# Altium PCB diban v0.0.PcbDoc
Units mm, origin at the board's own origin, x right, y up, seen from the top; angles counter-clockwise.
Board outline 82 x 65 mm, 2 copper layers (Top Layer, Bottom Layer); 21 components, 10 nets, 94 pads, 162 vias.
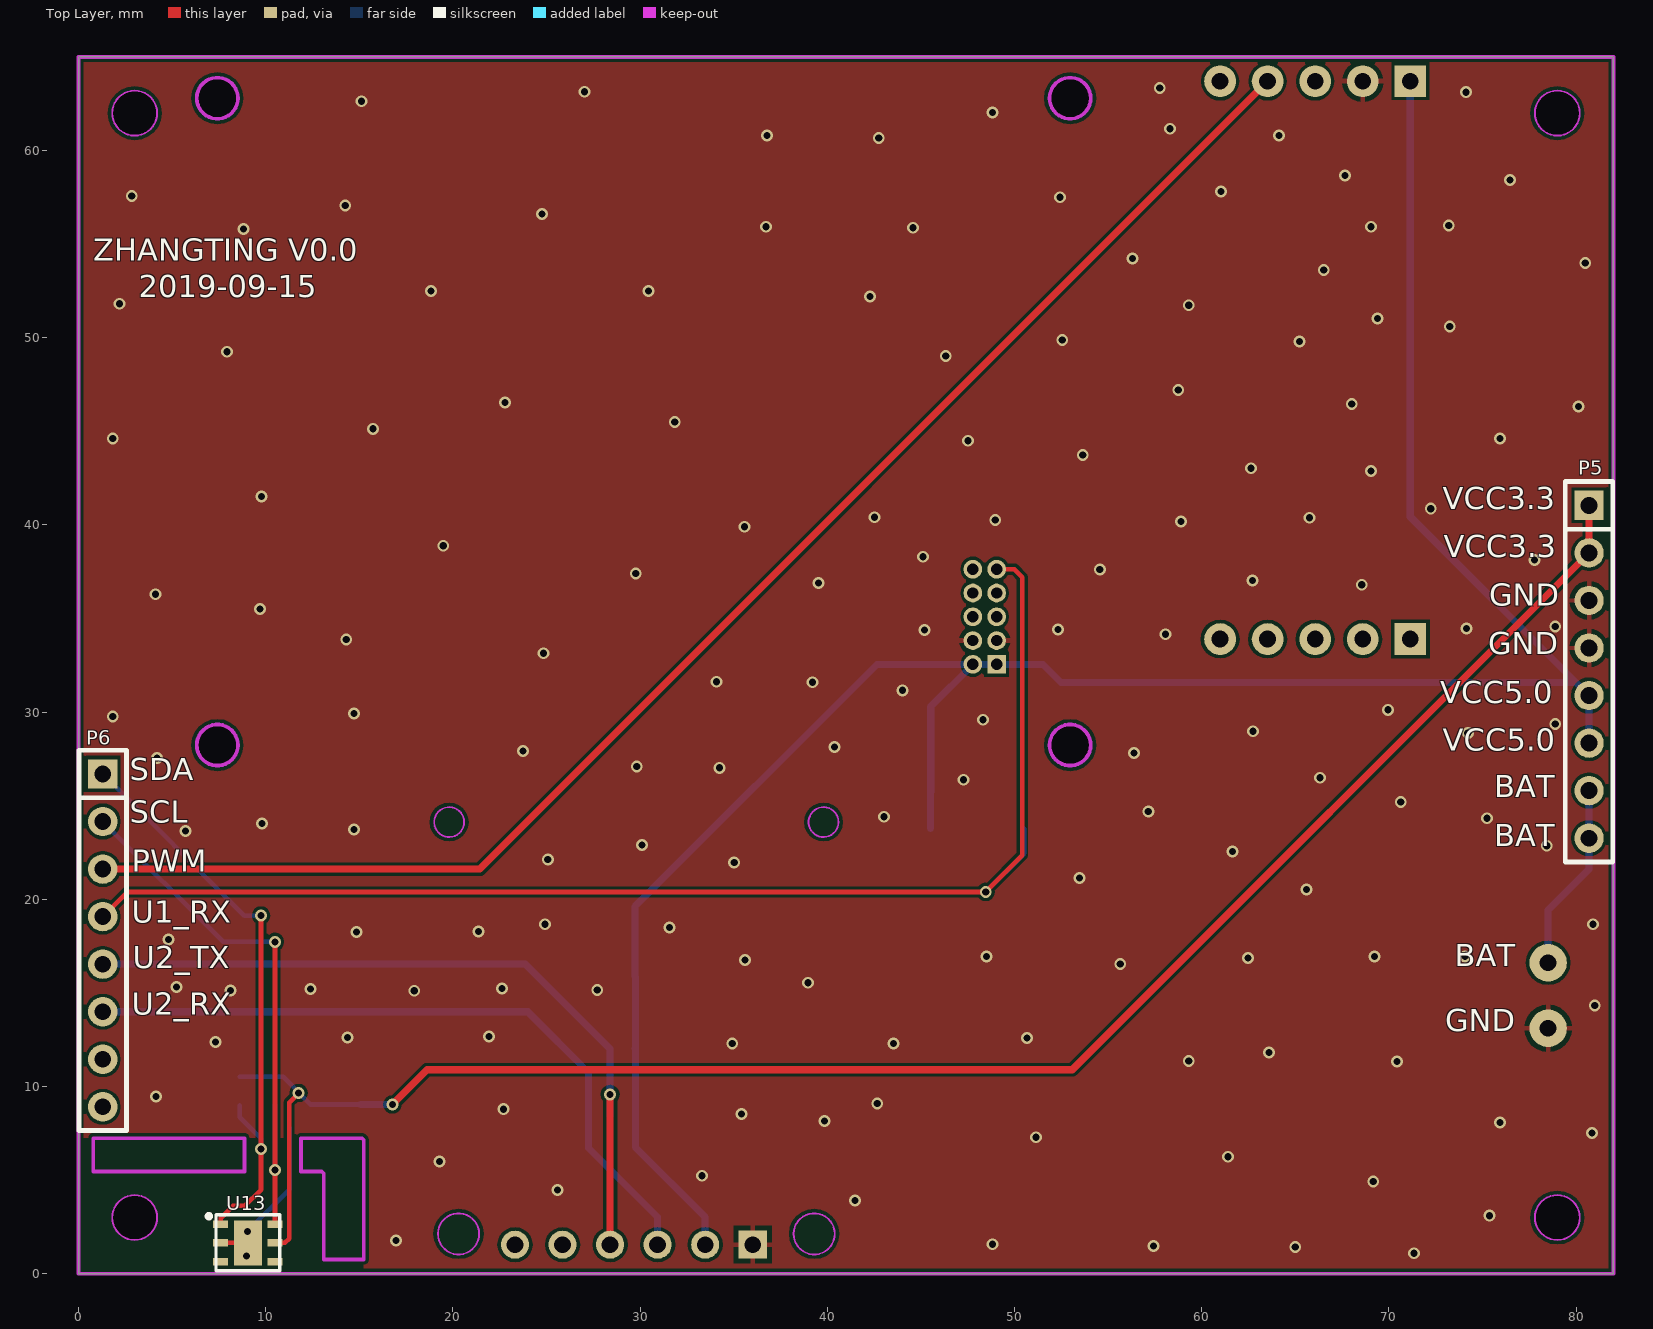
[diagram p0: Top Layer view]
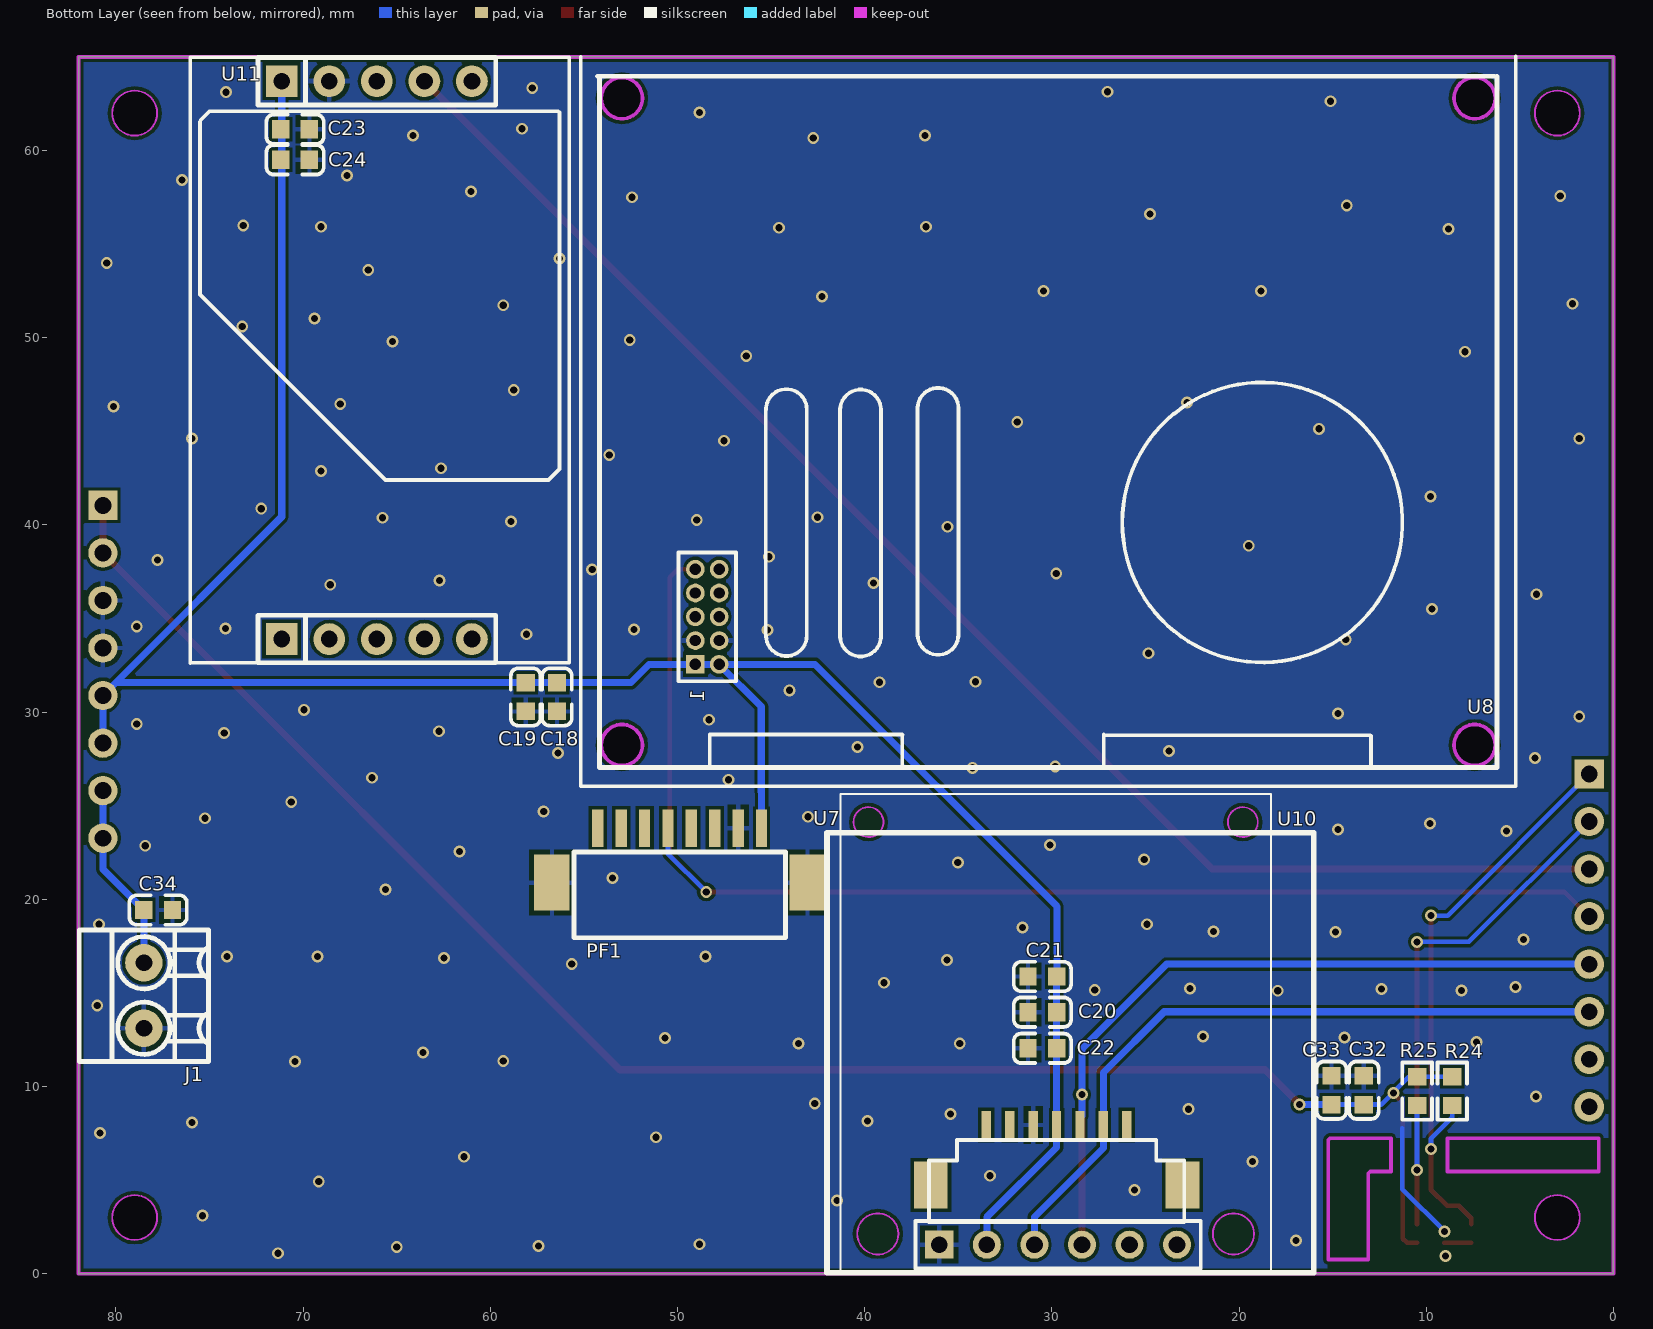
[diagram p1: Bottom Layer view, seen from below]
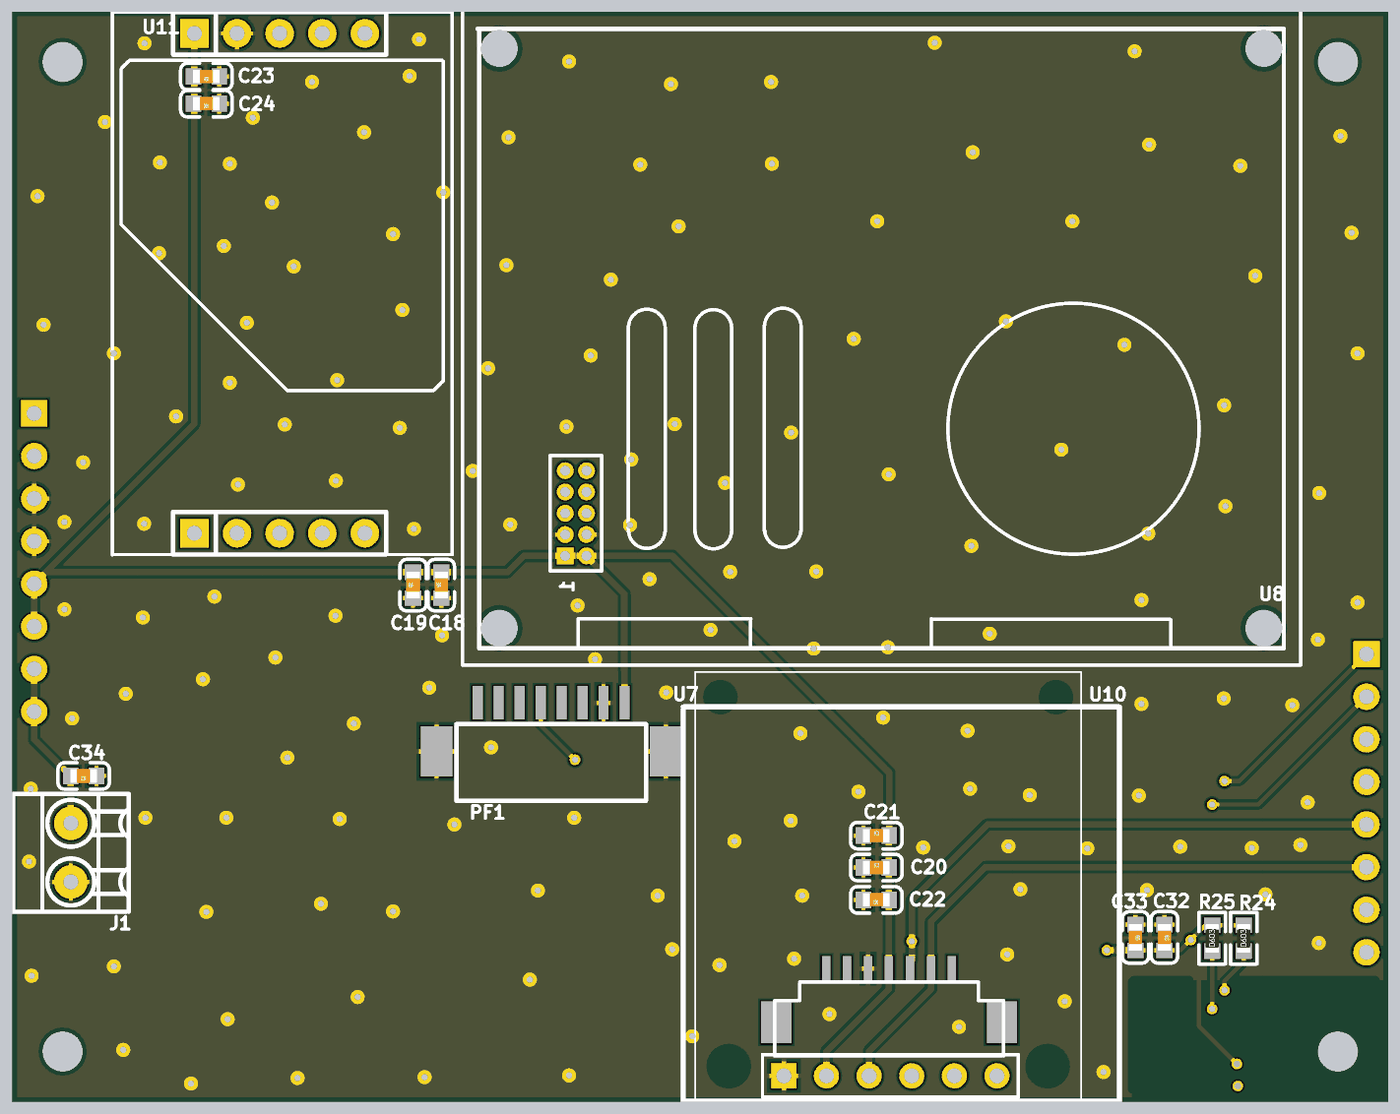
[diagram p2: 3D render of the assembled board from below, using the file's embedded part models]

## Layer stack, top to bottom
Top Layer: signal copper 0.0356
Dielectric: dielectric 0.32, FR-4, Dk 4.8
Bottom Layer: signal copper 0.0356

## Board outline
0,0 82,0 82,65 0,65
cut-out: 6.317,28.241 ccw(c7.417,28.241) 7.417,27.141 ccw(c7.417,28.241) 8.517,28.241 ccw(c7.417,28.241) 7.417,29.341 ccw(c7.417,28.241)
cut-out: 51.872,28.241 ccw(c52.972,28.241) 52.972,27.141 ccw(c52.972,28.241) 54.072,28.241 ccw(c52.972,28.241) 52.972,29.341 ccw(c52.972,28.241)
cut-out: 51.872,62.8 ccw(c52.972,62.8) 52.972,61.7 ccw(c52.972,62.8) 54.072,62.8 ccw(c52.972,62.8) 52.972,63.9 ccw(c52.972,62.8)
cut-out: 7.417,61.7 cw(c7.417,62.8) 6.317,62.8 cw(c7.417,62.8) 7.417,63.9 cw(c7.417,62.8) 8.517,62.8 cw(c7.417,62.8)
cut-out: 77.8,62 ccw(c79,62) 79,60.8 ccw(c79,62) 80.2,62 ccw(c79,62) 79,63.2 ccw(c79,62)
cut-out: 77.8,3 ccw(c79,3) 79,1.8 ccw(c79,3) 80.2,3 ccw(c79,3) 79,4.2 ccw(c79,3)
cut-out: 1.8,3 ccw(c3,3) 3,1.8 ccw(c3,3) 4.2,3 ccw(c3,3) 3,4.2 ccw(c3,3)
cut-out: 3,60.8 cw(c3,62) 1.8,62 cw(c3,62) 3,63.2 cw(c3,62) 4.2,62 cw(c3,62)

## Design rules (kind name [scope] priority, off if disabled: settings)
Clearance [All] p1: gap=0.178
ComponentClearance [All] p1: gap=0 collisioncheckmode=3 verticalgap=0 showdistances=FALSE
HoleToHoleClearance [All] p1: gap=0 allowstackedmicrovias=TRUE
MinimumSolderMaskSliver [All] p1: minsoldermaskwidth=0
PolygonConnect PolygonConnect_1 [IsVia] p1: connectstyle=Direct reliefconductorwidth=0.254 reliefentries=4 polygonreliefangle="90 Angle" airgapwidth=0.254
PolygonConnect [All] p2: connectstyle=Relief reliefconductorwidth=0.254 reliefentries=4 polygonreliefangle="90 Angle" airgapwidth=0.254
RoutingVias [All] p1: holewidth=0.711 width=1.27 viastyle="Through Hole" minholewidth=0.711 minwidth=1.27 maxholewidth=0.711 maxwidth=1.27
SilkToSilkClearance [All] p1: silktosilkclearance=0
SilkToSolderMaskClearance [IsPad] p1: minsilkscreentomaskgap=0 clearancetoexposedcopper=TRUE
SolderMaskExpansion [All] p1: expansion=0.102
Width [All] p1: maxlimit=0.889 minlimit=0.178 preferedwidth=0.254
23 further rules are at their usual default settings.

## Components (designator, comment, footprint, x,y, rotation, side; value= is the part's Value field where it differs from the comment)
C18 "10uF (106) 10% 10V" 0603_C 56.439,30.81 r90 bottom
C19 "100nF (104) 10% 50V" 0603_C 58.115,30.81 r90 bottom
C20 "10uF (106) 10% 10V" 0603_C 30.505,13.97 r180 bottom
C21 "100nF (104) 10% 50V" 0603_C 30.505,15.875 r180 bottom
C22 "100nF (104) 10% 50V" 0603_C 30.505,12.04 r0 bottom
C23 "10uF (106) 10% 10V" 0603_C 70.434,61.138 r0 bottom
C24 "100nF (104) 10% 50V" 0603_C 70.434,59.512 r0 bottom
C32 "100nF (104) 10% 50V" 0603_C 13.335,9.804 r270 bottom
C33 "10uF (106) 10% 10V" 0603_C 15.062,9.804 r270 bottom
C34 "100nF (104) 10% 50V" 0603_C 77.749,19.431 r0 bottom
J1 "3.5mm-2p" 3.5mm-2p 78.613,13.106 r270 bottom
P5 "2.54*8" 2.54*8 80.696,41.046 r270 top locked
P6 "2.54*8" 2.54*8 1.295,26.695 r270 top locked
PF1 "PCF-8" PCF-8 50.165,20.447 r180 bottom
R24 "4.7KΩ (4701) ±1%" 0603_R 8.611,9.754 r90 bottom
R25 "4.7KΩ (4701) ±1%" 0603_R 10.49,9.754 r90 bottom
U7 "DART WZ-S" "DART WZ-S" 36.017,1.549 r180 bottom
U8 "PM2.5" PM2.5 32.029,42.84 r0 bottom locked
U10 "ZE08-HCHO" ZE08-HCHO 41.3,0.127 r180 bottom
U11 "CO2 Sensor" "CO2 Sensor" 64.795,48.412 r90 bottom locked
U13 "SHT20" SHT20 9.042,1.651 r270 top

## Footprints (in the part's own frame and the unit in brackets; to place one, negate y for a bottom-side part, rotate by r counter-clockwise, add the part's x,y. Pads: shape width x height; smd on the part's side, far side on the other; paste and mask are expansions set on the pad)
2.54*8 [mm]
  rect 1.57x1.57 hole 0.9: 1(0,0)
  round 1.57 hole 0.9: 2(2.54,0) 3(5.08,0) 4(7.62,0) 5(10.16,0) 6(12.7,0) 7(15.24,0) 8(17.78,0)
  silkscreen extent -1.27,-1.27 19.05,1.27
3.5mm-2p [mm]
  round 2 hole 0.9: 1(-3.505,0.102) 2(-0.005,0.102)
  silkscreen extent -5.26,-3.35 1.77,3.55
0603_C [mm]
  rect 0.93x0.98 smd: 1(-0.77,0) 2(0.77,0)
  silkscreen extent -1.53,-0.79 1.54,0.79, body extent -0.8,-0.4 0.8,0.4, height 0.3
0603_R [mm]
  rect 0.93x0.98 smd: 1(-0.77,0) 2(0.77,0)
  silkscreen extent -1.53,-0.79 1.54,0.79, body extent -0.85,-0.4 0.85,0.4, height 0.56
"CO2 Sensor" [mm]
  rect 1.7x1.7 hole 0.9: 1(15.291,6.35) 10(-14.509,6.35)
  round 1.7 hole 0.9: 2(15.291,3.81) 3(15.291,1.27) 4(15.291,-1.27) 5(15.291,-3.81) 6(-14.509,-3.81) 7(-14.509,-1.27) 8(-14.509,1.27) 9(-14.509,3.81)
  silkscreen extent -15.8,-9.02 16.57,11.24
"DART WZ-S" [mm]
  round 1.5 hole 0.9: 1(12.7,0) 2(10.16,0) 3(7.62,0) 4(5.08,0) 5(2.54,0)
  rect 1.5x1.5 hole 0.9: 6(0,0)
  silkscreen extent -6,-1.5 20,22
PCF-8 [mm]
  rect 1.9x3 smd: 0(-6.546,0.445) 0(7.104,0.445)
  rect 0.6x2 smd: 1(-4.096,3.345) 2(-2.846,3.345) 3(-1.596,3.345) 4(-0.346,3.345) 5(0.904,3.345) 6(2.154,3.345) 7(3.404,3.345) 8(4.654,3.345)
  silkscreen extent -5.37,-2.5 5.94,2.07
PM2.5 [mm]
  rect 1x1 hole 0.6: 1(17.018,10.287)
  round 1 hole 0.6: 2(15.748,10.287) 3(17.018,9.017) 4(15.748,9.017) 5(17.018,7.747) 6(15.748,7.747) 7(17.018,6.477) 8(15.748,6.477) 9(17.018,5.207) 10(15.748,5.207)
  silkscreen extent -25.81,-21.13 22.24,15.8
SHT20 [mm]
  rect 2.4x1.5 smd: 0(0,0)
  rect 0.4x0.8 smd: 1(-1,-1.45) 2(0,-1.45) 3(1,-1.45) 4(1,1.45) 5(0,1.45) 6(-1,1.45)
  silkscreen extent -1.52,-2.18 1.5,1.7
ZE08-HCHO [mm]
  rect 1.8x2.5 smd: 0(4.834,4.615) 0(18.274,4.615)
  rect 0.5x1.5 smd: 1(7.799,7.815) 2(9.049,7.815) 3(10.299,7.815) 4(11.549,7.815) 5(12.799,7.815) 6(14.049,7.815) 7(15.299,7.815)
  Keep-Out Layer circle w0.1: c2,2 r1.1
  Keep-Out Layer circle w0.1: c1.5,24 r0.8
  Keep-Out Layer circle w0.1: c21,2 r1.1
  Keep-Out Layer circle w0.1: c21.5,24 r0.8
  silkscreen extent 0,0 23,25.5

## Part data
C18 C20 C23 C33: library part "0603 10uF (106) 10% 10V", "贴片电容"
C19 C21 C22 C24 C32 C34: library part "0603 100nF (104) 10% 50V", "贴片电容"
R24 R25: library part "0603 4.7KΩ (4701) 1%", "贴片电阻"

## Via types
v1: diameter 0.635, hole 0.381, Top Layer to Bottom Layer, 162 vias

## Nets (pads, with @x,y where several pads share a name; then routed paths per layer and width w, separated by ;. In a path a pad name is that pad's centre, name@x,y a point inside that pad or via, vN(x,y) a via of type N, cw(c..) or ccw(c..) an arc to the next point about the centre after c; other vN are vias at no path point)
BAT: C34.2 J1.1 P5.7 P5.8 | length 10.1
  Bottom Layer w0.381: J1.1 78.511,19.423 C34.2 80.696,21.607 P5.8 P5.7
CO2_PWM: P6.3 U11.4 | length 79.7
  Top Layer w0.381: P6.3 21.438,21.615 U11.4
GND: C18.1 C19.1 C20.1 C21.1 C22.2 C23.1 C24.1 C32.1 C33.1 C34.1 J1.2 P5.3 P5.4 PF1.0 PF1.7 U7.6 U8.3 U8.4 U10.3 U11.2 U13.0 U13.2 | length 7.9
  Top Layer w0.254: U13.2 U13.0
  Bottom Layer w0.254: v1(9.017,2.261) 11.278,4.521 11.278,7.772
  other v1: 8.966,0.94 71.349,1.092 64.999,1.422 57.429,1.473 48.819,1.575 16.967,1.778 75.387,3.099 41.478,3.912 25.578,4.47 69.164,4.928 33.299,5.232 19.279,5.994 61.417,6.248 51.156,7.29 80.848,7.518 75.946,8.077 39.853,8.153 35.408,8.534 22.708,8.788 42.672,9.093 4.14,9.474 70.434,11.328 59.309,11.354 63.602,11.811 34.925,12.294 43.536,12.294 7.315,12.37 50.673,12.598 14.376,12.624 21.92,12.675 81.001,14.326 17.932,15.113 8.128,15.138 27.711,15.164 12.395,15.215 22.631,15.24 5.232,15.316 38.964,15.545 55.651,16.535 35.611,16.764 62.484,16.866 48.514,16.942 69.24,16.942 74.066,16.942 4.801,17.856 14.859,18.263 21.361,18.288 31.572,18.491 24.917,18.669 80.899,18.669 65.608,20.523 53.467,21.133 35.027,21.971 25.07,22.123 61.646,22.555 78.435,22.86 30.099,22.911 5.715,23.647 14.707,23.724 9.804,24.054 75.235,24.333 43.028,24.409 57.15,24.689 70.637,25.197 47.269,26.391 66.319,26.492 34.239,27.026 29.82,27.102 4.191,27.559 56.388,27.813 23.749,27.915 40.386,28.143 74.219,28.88 62.738,28.981 78.892,29.362 48.311,29.591 1.829,29.769 14.707,29.921 69.952,30.124 44.018,31.166 39.218,31.598 34.087,31.623 24.841,33.147 14.3,33.884 58.064,34.163 45.187,34.392 52.324,34.417 74.143,34.468 78.892,34.569 9.703,35.509 4.115,36.297 68.555,36.805 39.522,36.906 62.713,37.033 29.769,37.414 54.559,37.617 77.775,38.125 45.11,38.303 19.482,38.887 35.585,39.903 58.903,40.183 48.971,40.259 65.761,40.386 42.52,40.411 72.238,40.869 9.779,41.529 69.037,42.875 62.636,43.028 53.645,43.739 47.523,44.501 1.829,44.628 75.946,44.628 15.723,45.136 31.852,45.491 80.137,46.33 68.021,46.457 22.784,46.533 58.75,47.219 46.33,49.022 7.925,49.251 65.227,49.809 52.553,49.886 73.254,50.597 69.393,51.029 59.309,51.74 2.184,51.816 42.291,52.197 18.821,52.502 30.455,52.502 66.523,53.619 80.493,54 56.312,54.229 8.814,55.804 44.577,55.88 36.728,55.931 69.037,55.931 73.203,56.007 24.765,56.617 14.249,57.074 52.426,57.506 2.845,57.582 61.036,57.81 76.479,58.42 67.666,58.674 42.748,60.681 36.779,60.808 64.135,60.808 58.318,61.163 48.819,62.027 15.113,62.636 74.117,63.119 27.026,63.144 57.76,63.348
SCL: P6.2 R25.1 U13.6 | length 30.4
  Top Layer w0.254: v1(10.49,17.729) 10.492,17.727 v1(10.492,5.539) U13.6
  Bottom Layer w0.254: P6.2 7.722,17.729 v1(10.49,17.729) ; R25.1 10.492,8.981 v1(10.492,5.539)
SDA: P6.1 R24.1 U13.1 | length 32.1
  Top Layer w0.254: U13.1 7.592,2.97 8.255,3.632 8.89,3.632 9.754,4.496 v1(9.754,6.655) v1(9.754,19.126)
  Bottom Layer w0.254: P6.1 8.865,19.126 v1(9.754,19.126) ; R24.1 8.611,8.357 9.754,7.214 v1(9.754,6.655)
U1_RX: P6.4 PF1.4 U8.9 | length 71.1
  Top Layer w0.254: P6.4 2.616,20.396 v1(48.463,20.396) 50.419,22.352 50.419,37.211 49.997,37.633 U8.9
  Bottom Layer w0.254: v1(48.463,20.396) 50.511,22.444 PF1.4
U2_RX: P6.6 U7.4 U10.6 | length 38
  Bottom Layer w0.381: P6.6 24.003,13.995 27.251,10.747 27.251,6.709 30.937,3.023 U7.4
U2_TX: P6.5 U7.3 U10.5 | length 40.6
  Top Layer w0.381: U7.3 v1(28.397,9.576)
  Bottom Layer w0.381: P6.5 23.876,16.535 28.397,12.014 U10.5@28.397,8.433
VCC3.3: C32.2 C33.2 P5.1 P5.2 R24.2 R25.2 U13.5 | length 96.3
  Top Layer w0.254: U13.5 11.024,1.651 11.252,1.88 11.252,9.144 v1(11.76,9.652)
  Top Layer w0.381: v1(16.764,9.042) 18.618,10.897 53.086,10.897 P5.2 P5.1
  Bottom Layer w0.254: R24.2 R25.2 10.923,10.524 12.413,9.034 C32.2 C33.2
  Bottom Layer w0.381: C33.2 15.07,9.042 v1(16.764,9.042)
VCC5.0: C18.2 C19.2 C20.2 C21.2 C22.1 C23.2 C24.2 P5.5 P5.6 PF1.8 U7.5 U8.1 U8.2 U10.4 U11.1 | length 129.1
  Bottom Layer w0.381: C22.1 29.751,12.024 29.751,6.749 33.477,3.023 U7.5 ; C22.1@29.751,12.04 29.751,15.859 C21.2 29.735,19.626 42.662,32.553 U8.2 ; PF1.8 45.511,30.287 U8.2 ; 45.537,25.748 45.537,30.226 ; U11.1 71.145,40.437 80.002,31.58 ; P5.6 P5.5 80.002,31.58 ; U8.2 U8.1 51.521,32.553 52.494,31.58 C18.2 C19.2 80.002,31.58
pads on no net: P6.7 P6.8 PF1.1 PF1.2 PF1.3 PF1.5 PF1.6 U7.1 U7.2 U8.5 U8.6 U8.7 U8.8 U8.10 U10.0 U10.1 U10.2 U10.7 U11.3 U11.5 U11.6 U11.7 U11.8 U11.9 U11.10 U13.3 U13.4

## Polygon pours and split planes (outlines as drawn)
GND on Bottom Layer "Top Layer-No Net" (solid, remove dead copper, pour order 2): 0,0 82,0 82,65 0,65
GND on Top Layer "Top Layer-No Net" (solid, remove dead copper, pour order 4): 0,0 82,0 82,65 0,65

## Keep-outs
Keep-Out Layer:
  circle w0.2: c52.972,62.8 r1.1
  circle w0.2: c52.972,28.241 r1.1
  circle w0.2: c7.417,28.241 r1.1
  circle w0.2: c7.417,62.8 r1.1
  circle w0.1: c79,62 r1.2
  circle w0.1: c79,3 r1.2
  circle w0.1: c3,3 r1.2
  circle w0.1: c3,62 r1.2
  lines w0.2: 0.787,5.461 5.055,5.461 8.865,5.461 8.865,7.239 0.787,7.239 0.787,5.512 ; 0,0 82,0 82,65 0,65 0,0 ; 11.887,5.461 12.979,5.461 13.106,5.334 13.106,0.762 15.24,0.762 15.24,5.791 15.24,7.137 15.138,7.239 11.887,7.239 11.887,5.461

## Other copper
Top Layer:
  pour cut-out: 0,0 15.291,0 15.24,0.051 15.24,7.137 15.113,7.264 0,7.264
Bottom Layer:
  pour cut-out: 0,0 15.291,0 15.291,7.087 15.113,7.264 0,7.264

## Silkscreen, mask and mechanical layers (free items; w line width, h text height)
Top Overlay:
  text "ZHANGTING V0.0" at 0.787,53.721 h2.03
  text "2019-09-15" at 3.226,51.765 h2.03
  text "ZHANGTING V0.0" at -114.122,44.425 h2.03
  text "2019-09-15" at -111.684,42.469 h2.03
  text "VCC3.3" at 72.873,40.437 h2.03
  text "VCC3.3" at 72.923,37.871 h2.03
  text "GND" at 75.362,35.281 h2.03
  text "GND" at 75.311,32.69 h2.03
  text "VCC5.0" at 72.746,30.074 h2.03
  text "VCC5.0" at 72.873,27.534 h2.03
  text "SDA" at 2.743,25.959 h2.03
  text "BAT" at 75.641,25.044 h2.03
  text "SCL" at 2.743,23.698 h2.03
  text "BAT" at 75.641,22.428 h2.03
  text "PWM" at 2.845,21.082 h2.03
  text "U1_RX" at 2.845,18.339 h2.03
  text "BAT" at 73.508,16.027 h2.03
  text "U2_TX" at 2.896,15.926 h2.03
  text "U2_RX" at 2.845,13.437 h2.03
  text "GND" at 73.025,12.548 h2.03
Bottom Overlay:
  lines w0.2: 5.217,65.024 5.217,26.041 55.172,26.041 55.172,64.999

## Text inside footprints (layer, text, board x,y; h text height)
U8: Bottom Overlay "1" at 48.572,31.207 h0.76 r270